# EAGLE board GadgetsP2 (EAGLE 6.5.0)
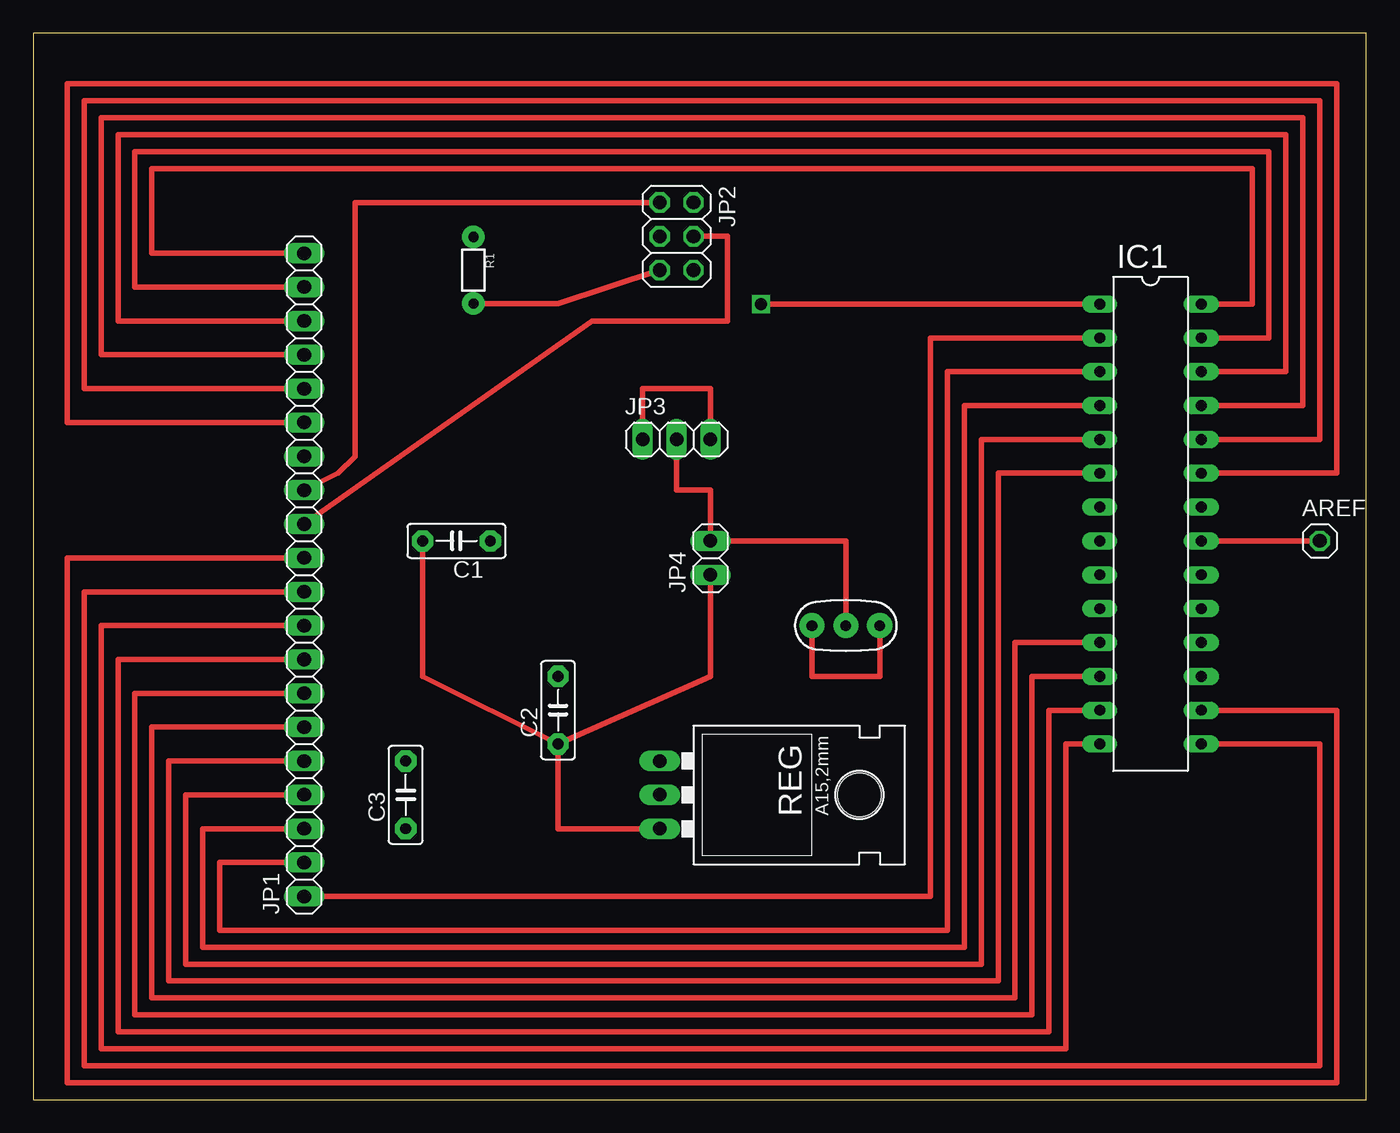
[diagram p0: board, top side]
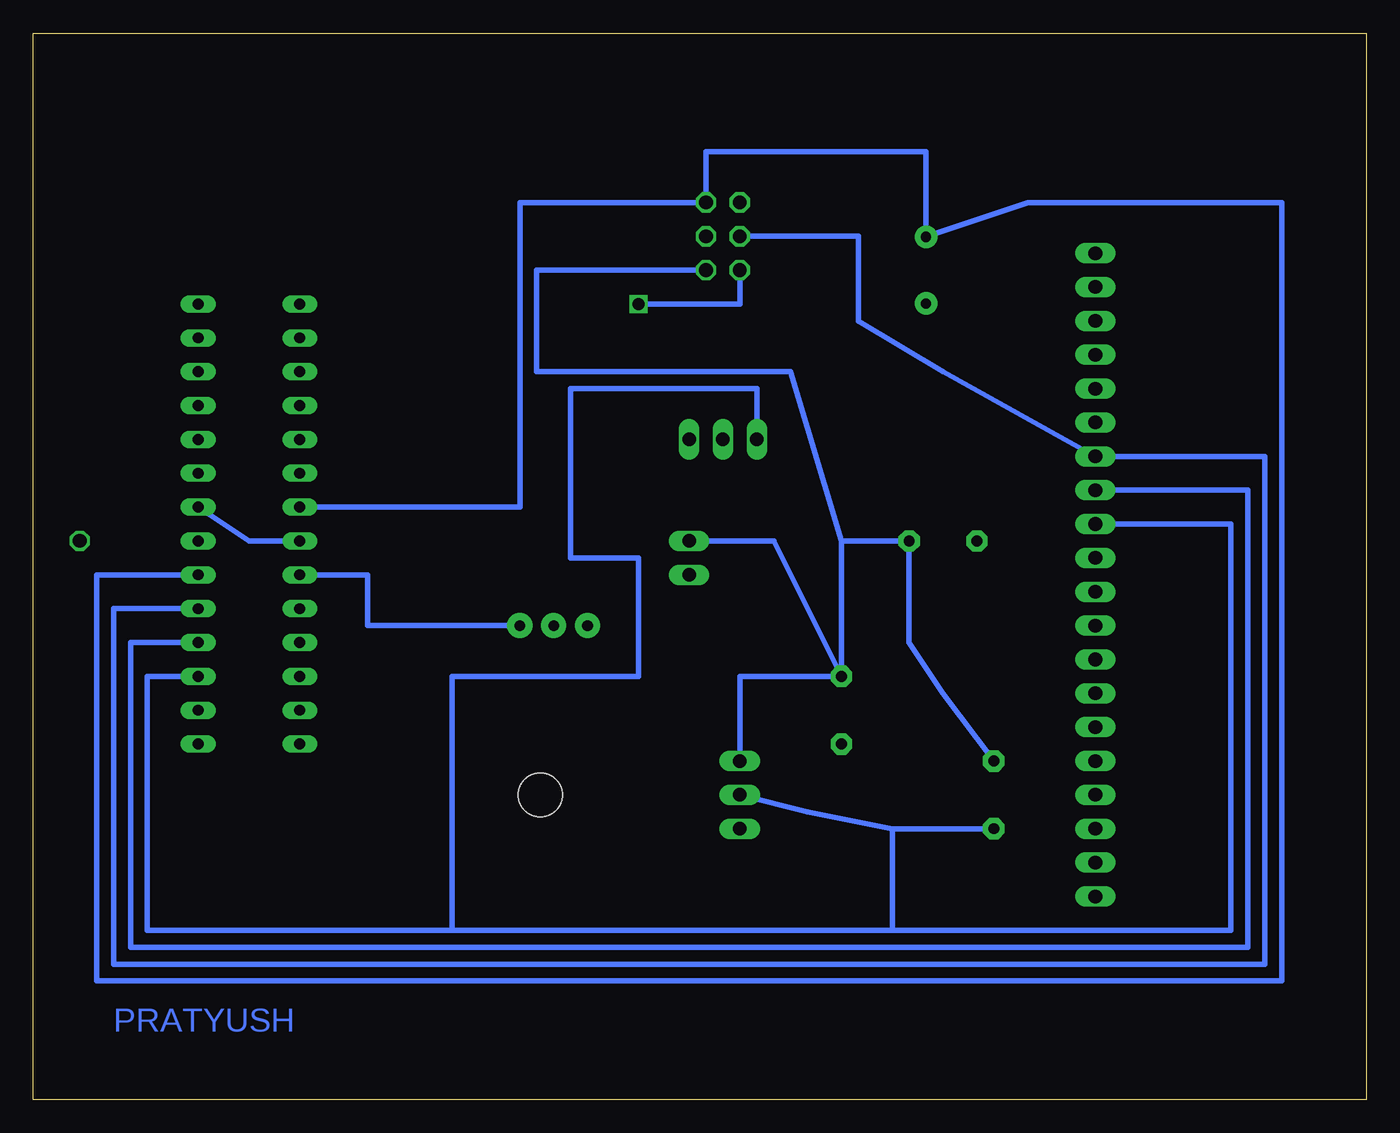
[diagram p1: board, bottom side, seen from below]

Size 100 x 80 mm. Coordinates in mm from the lower left corner, seen from the top.
Outline: 0,0 100,0 100,80 0,80 0,0
Copper layers (1*16): Top 0.035mm / dielectric 1.5mm / Bottom 0.035mm
Design rules "default": minimum track width 10mil, minimum drill 24mil, track to track 8mil, track to pad 8mil, pad to pad 8mil, via to via 8mil, smd to smd 8mil, copper to edge 40mil, drill to drill 8mil, minimum pad ring 10mil, minimum via ring 8mil, stop-mask expansion 4mil, vias tented up to drill 0mil, thermal gap 10mil

## Footprints (pad centres in the part's own frame; a part is rotated, then mirrored left to right if it is on the bottom)
1X01 = drill 1.016 octagon: 1 0,0
C5B2.5 = drill 0.813 pad 1.6 octagon: 1 -2.54,0; 2 2.54,0
DIL28-3 = drill 0.813 long: 1 -16.51,-3.81; 2 -13.97,-3.81; 3 -11.43,-3.81; 4 -8.89,-3.81; 5 -6.35,-3.81; 6 -3.81,-3.81; 7 -1.27,-3.81; 8 1.27,-3.81; 9 3.81,-3.81; 10 6.35,-3.81; 11 8.89,-3.81; 12 11.43,-3.81; 13 13.97,-3.81; 14 16.51,-3.81; 15 16.51,3.81; 16 13.97,3.81; 17 11.43,3.81; 18 8.89,3.81; 19 6.35,3.81; 20 3.81,3.81; 21 1.27,3.81; 22 -1.27,3.81; 23 -3.81,3.81; 24 -6.35,3.81; 25 -8.89,3.81; 26 -11.43,3.81; 27 -13.97,3.81; 28 -16.51,3.81
1X20 = drill 1.016 long: 1 -24.13,0; 2 -21.59,0; 3 -19.05,0; 4 -16.51,0; 5 -13.97,0; 6 -11.43,0; 7 -8.89,0; 8 -6.35,0; 9 -3.81,0; 10 -1.27,0; 11 1.27,0; 12 3.81,0; 13 6.35,0; 14 8.89,0; 15 11.43,0; 16 13.97,0; 17 16.51,0; 18 19.05,0; 19 21.59,0; 20 24.13,0
2X03 = drill 1.016 octagon: 1 -2.54,-1.27; 2 -2.54,1.27; 3 0,-1.27; 4 0,1.27; 5 2.54,-1.27; 6 2.54,1.27
1X03 = drill 1.016 long: 1 -2.54,0; 2 0,0; 3 2.54,0
1X02 = drill 1.016 long: 1 -1.27,0; 2 1.27,0
1/6W-RES = drill 0.762 pad 1.676: 1 -2.5,0; 2 2.5,0
78XXL = drill 1.016 long: GND 0,-3.81; IN -2.54,-3.81; OUT 2.54,-3.81 | hole 3.302: 0,11.176
RESONATOR-PTH = drill 0.8 pad 1.88: 1 -2.54,0; 2 0,0; 3 2.54,0

## Placement (x,y rotation side)
AREF  [1X01]  96.52,41.91 0 top
C1  [C5B2.5]  31.75,41.91 180 top
C2  [C5B2.5]  39.37,29.21 90 top
C3  [C5B2.5]  27.94,22.86 90 top
IC1  MEGA8-P  [DIL28-3]  83.82,43.18 270 top
JP1  [1X20]  20.32,39.37 90 top
JP2  [2X03]  48.26,64.77 270 top
JP3  [1X03]  48.26,49.53 0 top
JP4  [1X02]  50.8,40.64 90 top
R1  [1/6W-RES]  33.02,62.23 270 top
REG  [78XXL]  50.8,22.86 270 top
Y1  [RESONATOR-PTH]  60.96,35.56 180 top

## Library data of the parts
AREF JP1-JP4 = pinhead
C1-C3 = capacitor-wima
IC1 = atmel; OC_FARNELL: unknown; OC_NEWARK: unknown
R1 = SparkFun-Resistors
REG = SparkFun-PowerIC
Y1 = SparkFun-FreqCtrl

## Nets
+5V: IC1.7 IC1.20 JP2.2 R1.1
A0: IC1.23 JP1.15
A1: IC1.24 JP1.16
A2: IC1.25 JP1.17
A3: IC1.26 JP1.18
A4: IC1.27 JP1.19
A5: IC1.28 JP1.20
D0: IC1.2 JP1.1
D1: IC1.3 JP1.2
D2: IC1.4 JP1.3
D3: IC1.5 JP1.4
D4: IC1.6 JP1.5
D5: IC1.11 JP1.6
D6: IC1.12 JP1.7
D7: IC1.13 JP1.8
D8: IC1.14 JP1.9
D9: IC1.15 JP1.10
D10: IC1.16 JP1.11
D11: IC1.17 JP1.12 JP2.4
D12: IC1.18 JP1.13 JP2.1
D13: IC1.19 JP1.14 JP2.3
GND: C1.1 C2.2 C3.2 JP2.6 JP3.2 JP4.2 REG.IN Y1.2
N$1: IC1.9 Y1.1 Y1.3
N$3: AREF.1 IC1.21
RESET: IC1.1 JP2.5 R1.2
S$1: C1.2 C2.1 JP4.1 REG.OUT
S$2: IC1.8 IC1.22
V+: C3.1 JP3.1 JP3.3 REG.GND

## Tracks (layer width: path | path; a pad name or v marks a point on that pad's centre or on a via)
+5V
  Bottom 0.406: IC1.20 95.25,39.37 95.25,8.89 6.35,8.89 6.35,67.31 25.4,67.31 R1.1 33.02,71.12 49.53,71.12 JP2.2 63.5,67.31 63.5,44.45 IC1.7
A0
  Top 0.406: JP1.15 2.54,50.8 2.54,76.2 97.79,76.2 97.79,46.99 IC1.23
A1
  Top 0.406: JP1.16 3.81,53.34 3.81,74.93 96.52,74.93 96.52,49.53 IC1.24
A2
  Top 0.406: JP1.17 5.08,55.88 5.08,73.66 95.25,73.66 95.25,52.07 IC1.25
A3
  Top 0.406: JP1.18 6.35,58.42 6.35,72.39 93.98,72.39 93.98,54.61 IC1.26
A4
  Top 0.406: JP1.19 7.62,60.96 7.62,71.12 92.71,71.12 92.71,57.15 IC1.27
A5
  Top 0.406: JP1.20 8.89,63.5 8.89,69.85 91.44,69.85 91.44,59.69 IC1.28
D0
  Top 0.406: JP1.1 67.31,15.24 67.31,57.15 IC1.2
D1
  Top 0.406: JP1.2 13.97,17.78 13.97,12.7 68.58,12.7 68.58,54.61 IC1.3
D2
  Top 0.406: JP1.3 12.7,20.32 12.7,11.43 69.85,11.43 69.85,52.07 IC1.4
D3
  Top 0.406: JP1.4 11.43,22.86 11.43,10.16 71.12,10.16 71.12,49.53 IC1.5
D4
  Top 0.406: JP1.5 10.16,25.4 10.16,8.89 72.39,8.89 72.39,46.99 IC1.6
D5
  Top 0.406: JP1.6 8.89,27.94 8.89,7.62 73.66,7.62 73.66,34.29 IC1.11
D6
  Top 0.406: JP1.7 7.62,30.48 7.62,6.35 74.93,6.35 74.93,31.75 IC1.12
D7
  Top 0.406: JP1.8 6.35,33.02 6.35,5.08 76.2,5.08 76.2,29.21 IC1.13
D8
  Top 0.406: JP1.9 5.08,35.56 5.08,3.81 77.47,3.81 77.47,26.67 IC1.14
D9
  Top 0.406: JP1.10 3.81,38.1 3.81,2.54 96.52,2.54 96.52,26.67 IC1.15
D10
  Top 0.406: JP1.11 2.54,40.64 2.54,1.27 97.79,1.27 97.79,29.21 IC1.16
D11
  Top 0.406: JP2.4 52.07,64.77 52.07,58.42 41.91,58.42 JP1.12
  Bottom 0.406: IC1.17 91.44,31.75 91.44,12.7 10.16,12.7 10.16,43.18 JP1.12
D12
  Top 0.406: JP2.1 24.13,67.31 24.13,48.26 22.86,46.99 JP1.13
  Bottom 0.406: IC1.18 92.71,34.29 92.71,11.43 8.89,11.43 8.89,45.72 JP1.13
D13
  Bottom 0.406: IC1.19 93.98,36.83 93.98,10.16 7.62,10.16 7.62,48.26 JP1.14 31.75,54.61 38.1,58.42 38.1,64.77 JP2.3
GND
  Top 0.406: JP3.2 48.26,45.72 50.8,45.72 JP4.2 60.96,41.91 Y1.2
  Bottom 0.406: C3.2 31.75,30.48 34.29,34.29 C1.1 39.37,41.91 | 39.37,41.91 C2.2 | 39.37,41.91 43.18,54.61 62.23,54.61 62.23,62.23 JP2.6 | C2.2 44.45,41.91 JP4.2 | C2.2 46.99,31.75 REG.IN
N$1
  Top 0.406: Y1.3 58.42,31.75 63.5,31.75 Y1.1
  Bottom 0.406: IC1.9 74.93,39.37 74.93,35.56 Y1.1
N$3
  Top 0.406: IC1.21 AREF.1
RESET  (via drill 0.9)
  Top 0.406: R1.2 39.37,59.73 JP2.5 | IC1.1 v54.61,59.69
  Bottom 0.406: v54.61,59.69 46.99,59.69 JP2.5
S$1
  Top 0.406: JP4.1 50.8,31.75 C2.1 | C1.2 29.21,31.75 C2.1 | C2.1 39.37,20.32 REG.OUT
S$2
  Bottom 0.406: IC1.22 83.82,41.91 IC1.8
V+
  Top 0.406: JP3.1 45.72,53.34 50.8,53.34 JP3.3
  Bottom 0.406: C3.1 35.56,20.32 | 35.56,20.32 41.91,21.59 REG.GND | JP3.1 45.72,53.34 59.69,53.34 59.69,40.64 54.61,40.64 54.61,31.75 68.58,31.75 68.58,12.7 35.56,12.7 35.56,20.32

## Text on the board
Bottom: PRATYUSH